# Altium PCB YA-N-PCB.PcbDoc
Units mm, origin at the board's own origin, x right, y up, seen from the top; angles counter-clockwise.
Board outline 60.1 x 78.1 mm, 2 copper layers (Top Layer, Bottom Layer); 104 components, 57 nets, 297 pads, 299 vias.
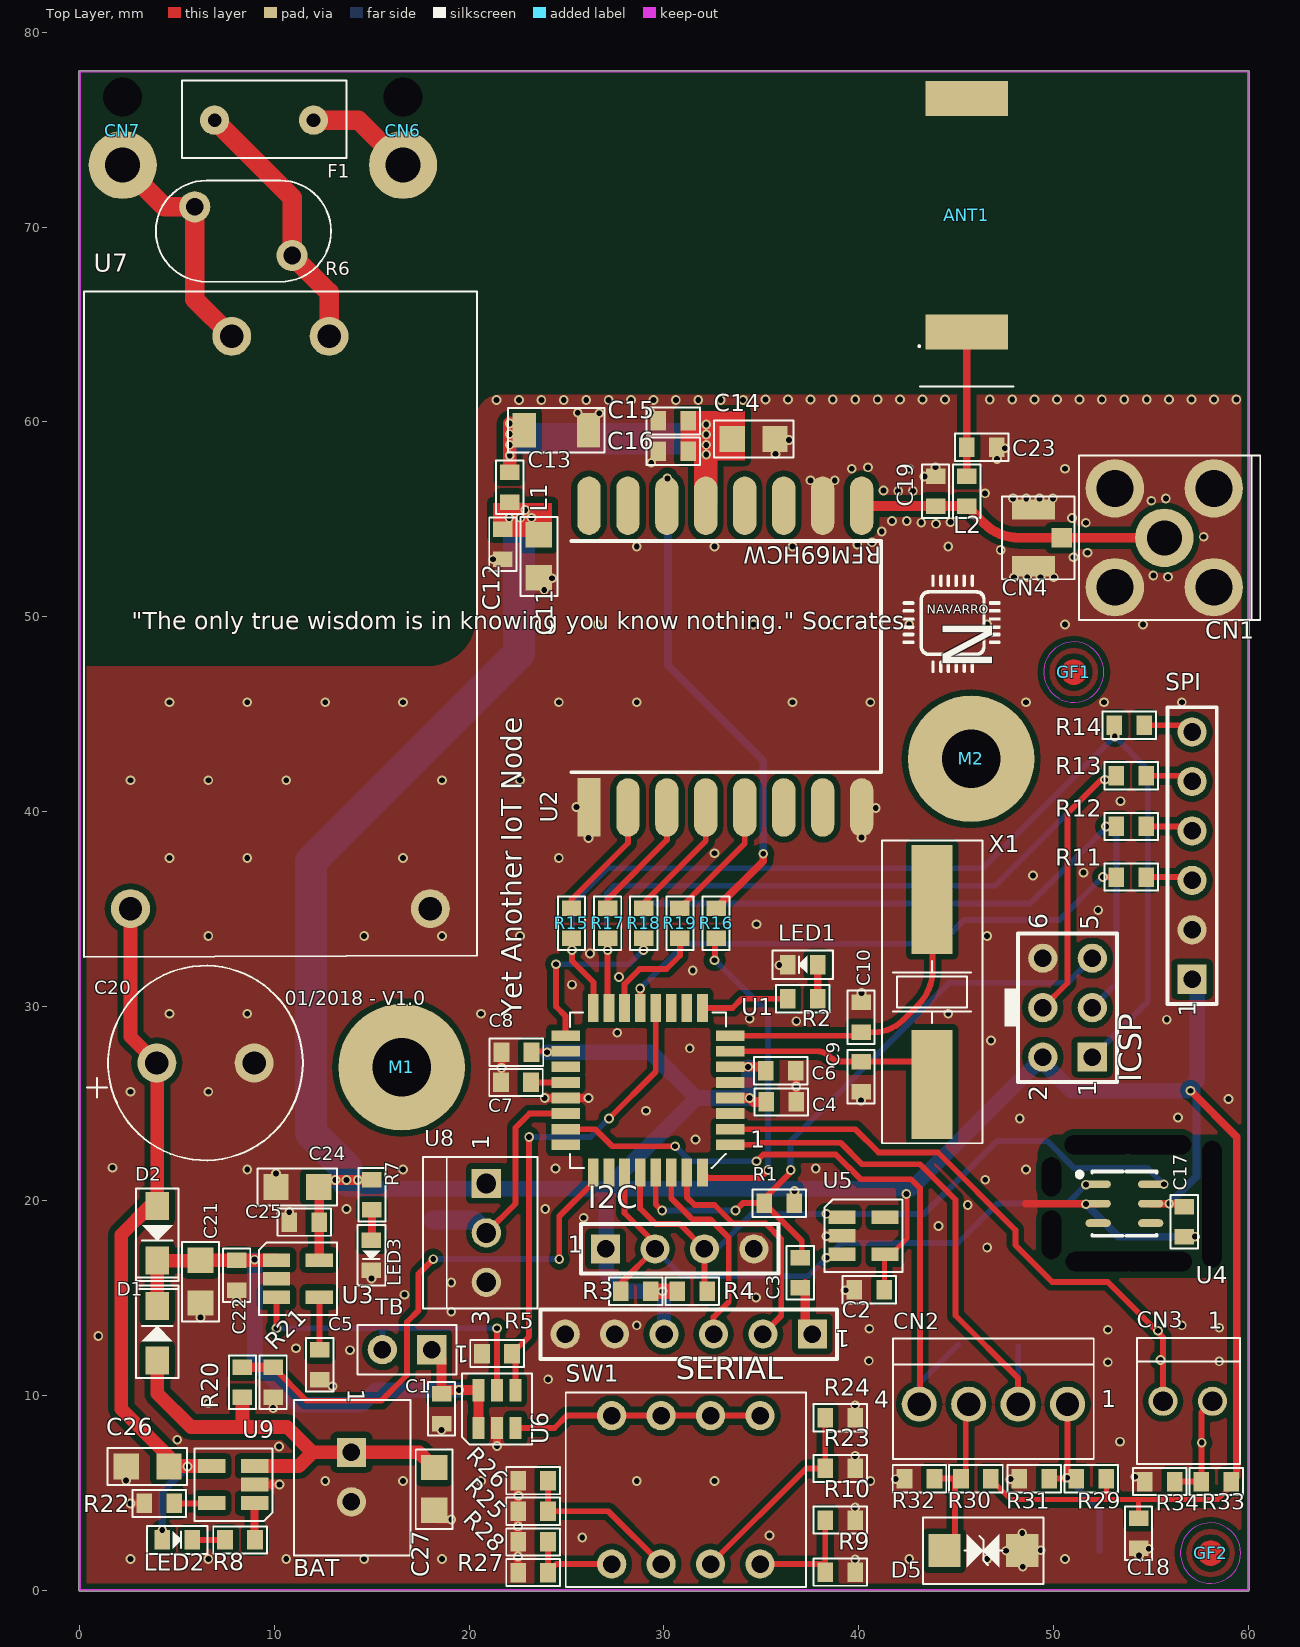
[diagram p0: Top Layer view]
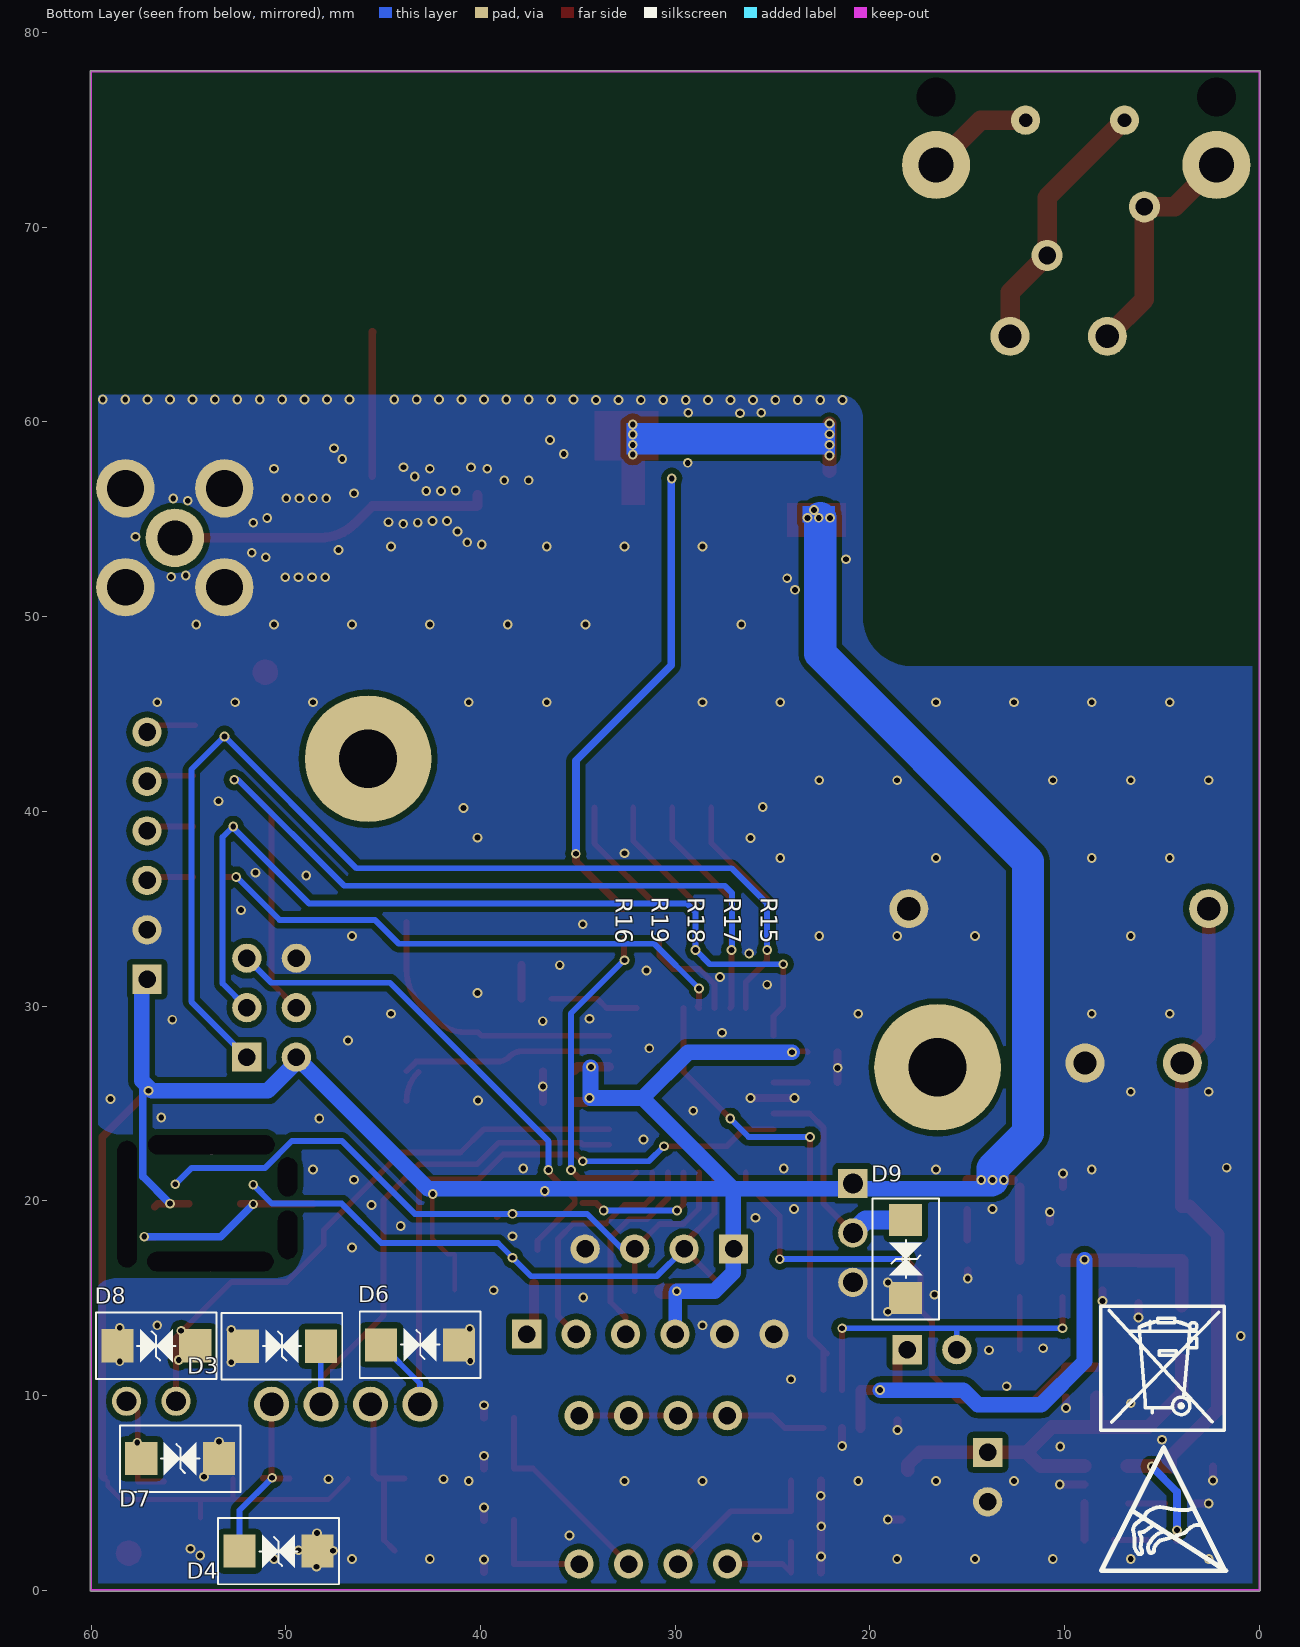
[diagram p1: Bottom Layer view, seen from below]

## Layer stack, top to bottom
Top Solder: solder mask 0.0102, Solder Resist, Dk 3.5
Top Layer: signal copper 0.0356
Dielectric 1: dielectric 0.32, FR-4, Dk 4.8
Bottom Layer: signal copper 0.0356
Bottom Solder: solder mask 0.0102, Solder Resist, Dk 3.5

## Board outline
0,-0.05 cw(c0,0) -0.05,0 -0.05,78 cw(c0,78) 0,78.05 60,78.05 cw(c60,78) 60.05,78 60.05,0 cw(c60,0) 60,-0.05

## Design rules (kind name [scope] priority, off if disabled: settings)
Clearance [All] p1: gap=0.3 ignorepadtopadclearanceinfootprint=FALSE except(0: Arc-Hole Track-Hole SMDPad-Hole THPad-Hole Via-Hole Fill-Hole Poly-Hole Region-Hole Text-Hole)
PolygonConnect [All] p1: connectstyle=Direct reliefconductorwidth=0.254 reliefentries=4 polygonreliefangle="90 Angle" airgapwidth=0.254
RoutingVias [All] p1: holewidth=0.711 width=1.27 viastyle="Through Hole" minholewidth=0.711 minwidth=1.27 maxholewidth=0.711 maxwidth=1.27
SolderMaskExpansion [All] p1: expansion=0.102
Width [All] p1: maxlimit=10 minlimit=0.254 preferedwidth=0.254 minimp=50.000000 maximp=50.000000 favimp=50.000000
30 further rules are at their usual default settings.

## Classes and differential pairs
component class "Power Supply": BAT C1 C5 C20 C21 C22 C24 C25 C26 C27 CN6 CN7 D1 D2 F1 LED2 LED3 R5 R6 R7 R8 R9 R10 R22 R23 R24 R25 R26 R27 R28 SW1 TB U3 U6 U7 U9
component class Radio: ANT1 C11 C12 C13 C14 C15 C16 C19 C23 CN1 CN4 L1 L2 R15 R16 R17 R18 R19 U2
component class Microcontroller: C2 C3 C4 C6 C7 C8 C9 C10 C18 CN2 CN3 D3 D4 D5 D6 D7 D8 D9 ICSP LED1 R1 R2 R11 R12 R13 R14 R20 R21 R29 R30 R31 R32 R33 R34 SERIAL SPI U1 U5 U8 X1
component class Sensors: C17 I2C R3 R4 U4
component class YA-N-Block: GF1 GF2 M1 M2

## Components (designator, comment, footprint, x,y, rotation, side; value= is the part's Value field where it differs from the comment)
ANT1 "Antena" ANT1204LL05R0915A 45.55,64.625 r90 top value="Antena Yageo"
BAT "Header 2" "CONN XH2.54 - 2" 13.95,7.075 r270 top value="Barra de 40 pinos - ATENÇÃO"
C1 "Capacitor Cerâmico" CC0603 18.575,9.325 r90 top value=100nF
C2 "Capacitor Cerâmico" CC0603 40.55,15.425 r0 top value=100nF
C3 "Capacitor Cerâmico" CC0603 37,16.3 r90 top value=100nF
C4 "Capacitor Cerâmico" CC0603 36.025,25.075 r180 top value=100nF
C5 "Capacitor Cerâmico" CC0603 12.325,11.575 r90 top value=10nF
C6 "Capacitor Cerâmico" CC0603 36,26.675 r180 top value=100nF
C7 "Capacitor Cerâmico" CC0603 22.4,26.075 r0 top value=100nF
C8 "Capacitor Cerâmico" CC0603 22.425,27.625 r0 top value=1uF
C9 "Capacitor Cerâmico" CC0603 40.125,26.375 r90 top value=20pF
C10 "Capacitor Cerâmico" CC0603 40.125,29.425 r270 top value=20pF
C11 "Capacitor Cerâmico" CC0805 23.575,53.1 r90 top value=10uF
C12 "Capacitor Cerâmico" CC0603 21.725,53.725 r90 top value=100nF
C13 "Capacitor Cerâmico" CC1206 24.475,59.575 r180 top value=100uF
C14 "Capacitor Cerâmico" CC0805 34.6,59.125 r180 top value=10uF
C15 "Capacitor Cerâmico" CC0603 30.475,60.05 r0 top value=1uF
C16 "Capacitor Cerâmico" CC0603 30.475,58.5 r0 top value=100nF
C17 "Capacitor Cerâmico" CC0603 56.725,18.925 r90 top value=100nF
C18 "Capacitor Cerâmico" CC0603 54.375,2.925 r90 top value=100nF
C19 "Capacitor Cerâmico" CC0603 43.95,56.45 r270 top value=OPEN
C20 "Capacitor Aluminio" CPOLRAD10X20 6.45,27.075 r180 top value=220uF
C21 "Capacitor Cerâmico" CC0805 6.2,15.85 r90 top value=10uF
C22 "Capacitor Cerâmico" CC0603 8.05,16.175 r90 top value=100nF
C23 "Capacitor Cerâmico" CC0603 46.325,58.7 r180 top value=OPEN
C24 "Capacitor Cerâmico" CC0805 11.175,20.7 r0 top value=10uF
C25 "Capacitor Cerâmico" CC0603 11.525,18.9 r0 top value=100nF
C26 "Capacitor Cerâmico" CC0805 3.475,6.35 r0 top value=4.7uF
C27 "Capacitor Cerâmico" CC0805 18.2,5.2 r90 top value=4.7uF
CN1 "Conn SMA" "CONN SMA-JACK" 55.7,54.05 r270 top value=SMA
CN2 "Conector KK" "CONN HDR4-POL P.100" 45.65,9.55 r0 top value="Macho - 4 Polos"
CN3 "Conector KK" "CONN HDR2-POL P.100" 58.175,9.7 r0 top value="Macho - 2 Polos"
CN4 "UMCC" "CONN U.FL" 48.975,54.05 r90 top
CN6 "CONN THRU" "CONN THRU" 16.6,73.2 r90 top
CN7 "CONN THRU" "CONN THRU" 2.2,73.2 r90 top
D1 "MBR0520L" SOD-123F 3.975,13.2 r90 top value=Vf=385mV@500mA
D2 "MBR0520L" SOD-123F 3.975,18.325 r270 top value=Vf=385mV@500mA
D3 "SMAJ5.0CA" "SMA BIDIR" 50.2,12.525 r0 bottom value=TVS
D4 "SMAJ5.0CA" "SMA BIDIR" 50.375,2 r180 bottom value=TVS
D5 "SMAJ5.0CA" "SMA BIDIR" 46.4,2.025 r180 top value=TVS
D6 "SMAJ5.0CA" "SMA BIDIR" 43.1,12.6 r0 bottom value=TVS
D7 "SMAJ5.0CA" "SMA BIDIR" 55.425,6.75 r0 bottom value=TVS
D8 "SMAJ5.0CA" "SMA BIDIR" 56.65,12.55 r180 bottom value=TVS
D9 "SMAJ5.0CA" "SMA BIDIR" 18.16,17.01 r90 bottom value=TVS
F1 "Fuse" BLOCKFUS_4X8 12,75.5 r180 top
GF1 "Fiducial" FIDUCIAL 51.05,47.15 r0 top
GF2 "Fiducial" FIDUCIAL 58.075,1.9 r0 top
I2C "Header 4" "CONN HDR1X4" 27,17.525 r0 top value="Macho - 4 Polos"
ICSP "Header 3X2" "CONN HDR2X3" 52,27.375 r90 top value=Macho
L1 "Bead" CC0603 22.075,56.65 r90 top value=1K@100MHz
L2 "Bead" CC0603 45.555,56.45 r90 top value=0uH
LED1 "LED" "LED 0603" 37.125,32.125 r180 top value=VD
LED2 "LED" "LED 0603" 5,2.575 r0 top value=VD
LED3 "LED" "LED 0603" 14.975,17.2 r270 top value=VD
M1 "Furo de Fixação" Furo_M3 16.525,26.85 r0 top value=M3
M2 "Furo de Fixação" Furo_M3 45.775,42.7 r0 top value=M3
R1 "Resistor" CC0603 35.925,19.875 r0 top value=10K
R2 "Resistor" CC0603 37.125,30.375 r180 top value=1K
R3 "Resistor" CC0603 28.55,15.35 r0 top value=4K7
R4 "Resistor" CC0603 31.45,15.35 r180 top value=4K7
R5 "Resistor" CC0603 21.425,12.15 r0 top value=10K
R6 "Varistor" DISCFUS7 8.4,69.8 r0 top value=270V
R7 "Resistor" CC0603 15,20.3 r90 top value=1K
R8 "Resistor" CC0603 8.225,2.575 r180 top value=470R
R9 "Resistor" CC0603 39.05,0.925 r180 top value=*R
R10 "Resistor" CC0603 39.05,3.6 r180 top value=*R
R11 "Resistor" CC0603 54,36.625 r0 top value=560R
R12 "Resistor" CC0603 54,39.225 r0 top value=560R
R13 "Resistor" CC0603 54,41.825 r0 top value=560R
R14 "Resistor" CC0603 53.9,44.425 r0 top value=560R
R15 "Resistor" CC0603 25.25,34.25 r90 top value=560R
R16 "Resistor" CC0603 32.675,34.25 r270 top value=560R
R17 "Resistor" CC0603 27.106,34.25 r90 top value=560R
R18 "Resistor" CC0603 28.962,34.25 r90 top value=560R
R19 "Resistor" CC0603 30.819,34.25 r90 top value=560R
R20 "Resistor" CC0603 8.35,10.675 r270 top value=*R
R21 "Resistor" CC0603 9.925,10.675 r90 top value=*R
R22 "Resistor" CC0603 4.075,4.45 r0 top value=*R
R23 "Resistor" CC0603 39.05,6.25 r180 top value=*R
R24 "Resistor" CC0603 39.05,8.85 r180 top value=*R
R25 "Resistor" CC0603 23.275,4.05 r0 top value=*R
R26 "Resistor" CC0603 23.275,5.625 r0 top value=*R
R27 "Resistor" CC0603 23.275,0.9 r0 top value=*R
R28 "Resistor" CC0603 23.275,2.475 r0 top value=*R
R29 "Resistor Open" CC0603 51.95,5.725 r0 top value=OPEN
R30 "Resistor Open" CC0603 46.025,5.725 r0 top value=OPEN
R31 "Resistor Open" CC0603 49.025,5.725 r0 top value=OPEN
R32 "Resistor Open" CC0603 43.125,5.725 r0 top value=OPEN
R33 "Resistor Open" CC0603 58.375,5.575 r0 top value=OPEN
R34 "Resistor Open" CC0603 55.475,5.575 r0 top value=OPEN
SERIAL "Header 6" "CONN HDR1X6" 37.625,13.15 r180 top value="Barra de 40 pinos - ATENÇÃO"
SPI "Header 6" "CONN HDR1X6" 57.125,31.375 r90 top value="Barra de 40 pinos - ATENÇÃO"
SW1 "SW-DIP4" SWITCH-DIP8 31.125,5.15 r0 top value=SPST
TB "Timer Bypass" "CONN HDR1X2" 18.075,12.35 r180 top value="Barra de 40 pinos - ATENÇÃO"
U1 "ATMEGA328P" TQFP-32N 29.175,25.675 r180 top
U2 "RFM69HCW" RFM69HCW 26.15,40.2 r90 top value="Rádio 915Mhz"
U3 "TPS79333DBVR" SOT-23-5N 11.2,16 r0 top
U4 "SI7006" QFN3x3-6P 53.65,19.85 r0 top
U5 "24AA02UIDT" SOT-23-5N 40.25,18.2 r0 top
U6 "TPL5111" TSOT-23-6N 21.425,9.3 r90 top
U7 "Hi-Link" Fonte-HILINK 10.3,49.7 r90 top
U8 "LM35" "CONN HDR3-POL P.100" 20.875,18.35 r90 top value=1MHz
U9 "MCP73831" SOT-23-5N 7.875,5.425 r180 top value="Vchrg=4V2 ~ 4V5"
X1 "16Mhz" HC/49US 43.775,30.725 r90 top value=20pF/40R

## Footprints (in the part's own frame and the unit in brackets; to place one, negate y for a bottom-side part, rotate by r counter-clockwise, add the part's x,y. Pads: shape width x height; smd on the part's side, far side on the other; paste and mask are expansions set on the pad)
ANT1204LL05R0915A [mm]
  rect 1.8x4.25 smd: 1(0,0) 2(12,0)
  silkscreen extent -2.8,-2.4 -0.68,2.49, body extent -0.1,-2.1 12.1,2.1, height 1.95
BLOCKFUS_4X8 [mm]
  round 1.499 hole 0.7: 1(0,0) 2(5.08,0)
  silkscreen extent -1.7,-2.05 6.74,1.95, body extent -1.7,-2.05 6.74,1.95, height 8.35
CC0603 [mm] "Chip Resistor, 2-Leads, Body 1,6x0,8mm, IPC Medium Density"
  rect 0.8x1 smd: 1(-0.77,0) 2(0.77,0)
  silkscreen extent -1.38,-0.7 1.38,0.7, body extent -0.8,-0.42 0.8,0.43, height 0.45
CC0805 [mm] "Chip Resistor, 2-Leads, Body 2,0x1,2mm, IPC Medium Density"
  rect 1.3x1.35 smd: 1(-1.1,0) 2(1.1,0)
  silkscreen extent -2.05,-0.95 2.02,0.95, body extent -1,-0.62 1,0.63, height 0.6
CC1206 [mm] "Chip Resistor, 2-Leads, Body 3,2x1,6mm, IPC Medium Density"
  rect 1.2x1.75 smd: 1(-1.65,0) 2(1.65,0)
  silkscreen extent -2.47,-1.15 2.47,1.15, body extent -1.6,-0.8 1.6,0.8, height 1
"CONN HDR1X2" [mm] "Connector; Header; 2 Position"
  rect 1.5x1.5 hole 0.9: 1(0,0)
  round 1.5 hole 0.9: 2(2.54,0)
  silkscreen extent -1.27,-1.27 3.81,1.27, body extent -1.27,-1.27 3.81,1.27, height 8.49
"CONN HDR1X4" [mm] "Connector; Header; 4 Position"
  rect 1.5x1.5 hole 0.9: 1(0,0)
  round 1.5 hole 0.9: 2(2.54,0) 3(5.08,0) 4(7.62,0)
  silkscreen extent -1.27,-1.27 8.89,1.27
"CONN HDR1X6" [mm] "Connector; Header; 6 Position"
  rect 1.5x1.5 hole 0.9: 1(0,0)
  round 1.5 hole 0.9: 2(2.54,0) 3(5.08,0) 4(7.62,0) 5(10.16,0) 6(12.7,0)
  silkscreen extent -1.27,-1.27 13.97,1.27
"CONN HDR2-POL P.100" [mm] "Conector KK Macho, Pitch 2.54mm, 2 Polos"
  round 1.5 hole 1.02: 1(0,0) 2(-2.54,0)
  silkscreen extent -3.89,-3.23 1.4,3.25, body extent -3.82,-3.12 1.26,3.23, height 10.69
"CONN HDR2X3" [mm] "Connector; Header; 3x2 Position"
  rect 1.5x1.5 hole 0.9: 1(0,0)
  round 1.5 hole 0.9: 2(0,2.54) 3(2.54,0) 4(2.54,2.54) 5(5.08,0) 6(5.08,2.54)
  silkscreen extent -1.27,-1.27 6.35,3.81, body extent -1.27,-1.27 6.35,3.81, height 8.49
"CONN HDR3-POL P.100" [mm] "Conector KK Macho, Pitch 2.54mm, 3 Polos"
  rect 1.5x1.5 hole 1.02: 1(2.54,0)
  round 1.5 hole 1.02: 2(0,0) 3(-2.54,0)
  silkscreen extent -3.89,-2.62 3.89,3.25, body extent -3.71,-2.36 3.79,2.54, height 10.4
"CONN HDR4-POL P.100" [mm] "Conector KK Macho, Pitch 2.54mm, 4 Polos"
  round 1.8 hole 1.2: 1(5.08,0) 2(2.54,0) 3(0,0) 4(-2.54,0)
  silkscreen extent -3.89,-2.81 6.43,3.38, body extent -3.49,-2.71 6.01,3.29, height 12
"CONN SMA-JACK" [mm]
  round 3 hole 1.8: 1(0,0)
  round 3 hole 1.9: 2(2.54,-2.54) 3(2.54,2.54) 4(-2.54,2.54) 5(-2.54,-2.54)
  silkscreen extent -4.22,-4.37 4.22,4.93
"CONN THRU" [mm]
  round 0 hole 2 unplated: 0(3.5,0)
  round 3.5 hole 1.8: 1(0,0)
"CONN U.FL" [mm] "LCC, 4-Pins, Body 3,4x5,2mm (max), Pitch 2,70mm, IPC High Density"
  rect 1x1.05 smd: 1(0,-1.452)
  rect 1.05x2.2 smd: 2(-1.452,0) 2(1.452,0)
  silkscreen extent -2.13,-2.12 2.12,1.61, body extent -1.5,-1.55 1.5,1.55, height 1.26
"CONN XH2.54 - 2" [mm] "Connector; Header; 2 Position"
  rect 1.5x1.5 hole 0.9: 1(0,0)
  round 1.5 hole 0.9: 2(2.54,0)
  silkscreen extent -2.69,-2.95 5.31,3.04, body extent -2.69,-2.95 5.31,3.05, height 7
CPOLRAD10X20 [mm]
  round 2 hole 1.2: 1(2.5,0) 2(-2.5,0)
  silkscreen extent -5,-5 6.08,5, body extent -5.08,-5.08 5.08,5.06, height 20.32
DISCFUS7 [mm]
  round 1.6 hole 0.9 mask+0.127: 1(-2.5,1.25) 2(2.5,-1.25)
  silkscreen extent -4.5,-2.6 4.5,2.6
FIDUCIAL [mm] "Guia fiducial sem uso de PAD"
  Top Layer region: 0,-0.65 -0.249,-0.601 -0.46,-0.46 -0.601,-0.249 -0.65,0 -0.65,0 -0.601,0.249 -0.46,0.46 -0.249,0.601 0,0.65 0,0.65 0.249,0.601 0.46,0.46 0.601,0.249 0.65,0 0.65,0 0.601,-0.249 0.46,-0.46 0.249,-0.601 0,-0.65
  Top Layer keep-out circle w0.01: c0,0 r1.55
Fonte-HILINK [mm]
  round 2 hole 1.2: 1(-14.7,7.7) 2(-14.7,-7.7) 3(14.7,-2.5) 4(14.7,2.5)
  silkscreen extent -17.19,-10.1 17,10.1, body extent -17.19,-10.1 17,10.1, height 15
Furo_M3 [mm] "Furo metalizado para parafuso M3"
  round 6.5 hole 3 paste+0: X(0,0)
  body extent -2.8,-2.8 2.8,2.8, height 2.38
HC/49US [mm] "Crystal, 2-Leads, Body 11,5x4,7mm, IPC Low Density"
  rect 5.6x2.1 smd: 1(-4.75,0) 2(4.75,0)
  silkscreen extent -7.77,-2.58 7.78,2.58, body extent -6.15,-2.25 6.15,2.25, height 5.18
"LED 0603" [mm] "Chip Diode, 2-Leads, Body 1,6x0,8mm, IPC Medium Density"
  rect 0.8x1 smd: 1(-0.77,0) 2(0.77,0)
  silkscreen extent -1.55,-0.72 1.55,0.72, body extent -0.82,-0.43 0.82,0.43, height 0.8
QFN3x3-6P [mm]
  oval 1.3x0.4 smd: 1(-1.35,1) 2(-1.35,0) 3(-1.35,-1) 4(1.35,-1) 5(1.35,0) 6(1.35,1)
  silkscreen extent -2.42,-1.65 1.65,1.65, body extent -1.5,-1.5 1.5,1.5, height 1.21
RFM69HCW [mm]
  rect 3x1.2 smd: 1(0,0)
  oval 3x1.2 smd: 2(0,-2) 3(0,-4) 4(0,-6) 5(0,-8) 6(0,-10) 7(0,-12) 8(0,-14) 9(15.5,-14) 10(15.5,-12) 11(15.5,-10) 12(15.5,-8) 13(15.5,-6) 14(15.5,-4) 15(15.5,-2) 16(15.5,0)
  silkscreen extent 1.81,-15 13.69,0.9, body extent -0.27,-14.97 15.73,0.93, height 2.29
"SMA BIDIR" [mm] "Molded Diode, 2-Leads, Body 4,3x2,5mm, IPC Medium Density"
  rect 1.65x1.7 smd: 1(-2,0) 2(2,0)
  silkscreen extent -3.1,-1.7 3.1,1.7, body extent -2.29,-1.39 2.28,1.4, height 2.31
SOD-123F [mm] "Molded Diode, 2-Leads, Body 2,6x1,7mm, IPC Medium Density"
  rect 1.45x1.2 smd: 1(-1.4,0) 2(1.4,0)
  silkscreen extent -2.3,-1.1 2.45,1.1, body extent -1.4,-0.95 1.4,0.95, height 1.11
SOT-23-5N [mm] "SOT23, 5-Leads, Body 3,1x2,7mm (max), Pitch 0,95mm, IPC Medium Density"
  rect 1.4x0.7 smd: 1(-1.1,0.95) 2(-1.1,0) 3(-1.1,-0.95) 4(1.1,-0.95) 5(1.1,0.95)
  silkscreen extent -2.01,-1.86 2,1.86, body extent -1.4,-1.45 1.4,1.45, height 1.09
SWITCH-DIP8 [mm] "DIP; 4 Leads; Row Spacing 7.62 mm; Pitch 2.54 mm"
  round 1.5 hole 0.9: 1(3.81,3.81) 2(1.27,3.81) 3(-1.27,3.81) 4(-3.81,3.81) 5(-3.81,-3.81) 6(-1.27,-3.81) 7(1.27,-3.81) 8(3.81,-3.81)
  silkscreen extent -6.17,-5 6.17,5, body extent -6.17,-4.89 6.17,4.89, height 8.14
TQFP-32N [mm] "TQFP, 32-Leads, Body 7.00x7.00mm, Pitch 0.80mm, IPC Medium Density"
  rect 1.45x0.55 smd: 1(-4.225,2.8) 2(-4.225,2) 3(-4.225,1.2) 4(-4.225,0.4) 5(-4.225,-0.4) 6(-4.225,-1.2) 7(-4.225,-2) 8(-4.225,-2.8) 17(4.225,-2.8) 18(4.225,-2) 19(4.225,-1.2) 20(4.225,-0.4) 21(4.225,0.4) 22(4.225,1.2) 23(4.225,2) 24(4.225,2.8)
  rect 0.55x1.45 smd: 9(-2.8,-4.225) 10(-2,-4.225) 11(-1.2,-4.225) 12(-0.4,-4.225) 13(0.4,-4.225) 14(1.2,-4.225) 15(2,-4.225) 16(2.8,-4.225) 25(2.8,4.225) 26(2,4.225) 27(1.2,4.225) 28(0.4,4.225) 29(-0.4,4.225) 30(-1.2,4.225) 31(-2,4.225) 32(-2.8,4.225)
  silkscreen extent -4,-4 4,4, body extent -4.5,-4.5 4.5,4.5, height 1.5
TSOT-23-6N [mm] "Thin SOT23, 6-Leads, Body 3,1x2,7mm (max), Pitch 0,95mm, IPC Medium Density"
  rect 1.15x0.6 smd: 1(-0.975,0.95) 2(-0.975,0) 3(-0.975,-0.95) 4(0.975,-0.95) 5(0.975,0) 6(0.975,0.95)
  silkscreen extent -1.83,-1.8 1.83,1.8, body extent -0.87,-1.55 0.87,1.55, height 1

## Part data
ANT1: library part "Antena Yageo 915Mhz", "Antena YAGEO", Supplier Part Number 1=311-1525-1-ND, ChinesePrice=0,00000, Chinês=----, ComponentLink1Description=Datasheet, ComponentLink1URL=D:\Tecnoclade\Datasheet\, Supplier 1=Digi-Key
BAT: "Header, 2-Pin", Supplier Part Number 1=A26509-40-ND, ChinesePrice=0,10000, Chinês="Proved - Local", ComponentLink1Description=Datasheet, ComponentLink1URL=D:\Tecnoclade\Datasheet\!DataMissing.pdf, Supplier 1=Digi-Key
C1 C2 C3 C4 C6 C7 C12 C16 C18 C22 C25: library part "Cap 100nF 50V 0603 X7R", "Capacitor (Semiconductor SIM Model)", Supplier Part Number 1=1276-1000-1-ND, Tolerância=±10%, ChinesePrice=0,00250, Chinês=Local, ComponentLink1Description=Datasheet, ComponentLink1URL=D:\Tecnoclade\Datasheet\!DataMissing.pdf, Corrente=*A, Obs=X7R, Potência=*W, Supplier 1=Digi-Key, Tensão=50V
C5: library part "Cap 10nF 50V 0603 X7R 5%", "Capacitor (Semiconductor SIM Model)", Supplier Part Number 1=399-1092-1-ND, Tolerância=±5%, ChinesePrice=0,00320, Chinês=Local, ComponentLink1Description=Datasheet, ComponentLink1URL=D:\Tecnoclade\Datasheet\!DataMissing.pdf, Corrente=*A, Obs=X7R, Potência=*W, Supplier 1=Digi-Key, Tensão=50V
C8 C15: library part "Cap 1uF 50V 0603 X5R", "Capacitor (Semiconductor SIM Model)", Supplier Part Number 1=587-2400-1-ND, Tolerância=±10%, ChinesePrice=0,01100, Chinês=Local, ComponentLink1Description=Datasheet, ComponentLink1URL=D:\Tecnoclade\Datasheet\!DataMissing.pdf, Corrente=*A, Obs=X5R, Potência=*W, Supplier 1=Digi-Key, Tensão=50V
C9 C10: library part "Cap - $Val $V $Footprint $Classe_1", "Capacitor (Semiconductor SIM Model)", Supplier Part Number 1=1276-1187-1-ND, Tolerância=±*%, ChinesePrice=0,00000, Chinês=----, ComponentLink1Description=Datasheet, ComponentLink1URL=D:\Tecnoclade\Datasheet\!DataMissing.pdf, Corrente=*A, Potência=*W, Supplier 1=Digi-Key, Tensão=50v
C11 C14 C21 C24: library part "Cap 10uF 25V 0805 X5R", "Capacitor (Semiconductor SIM Model)", Supplier Part Number 1=587-2985-1-ND, Tolerância=±10%, ChinesePrice=0,02620, Chinês=Local, ComponentLink1Description=Datasheet, ComponentLink1URL=D:\Tecnoclade\Datasheet\!DataMissing.pdf, Corrente=*A, Obs=X5R, Potência=*W, Supplier 1=Digi-Key, Tensão=25V
C13: library part "Cap 100uF 6.3V 1206 X5R", "Capacitor (Semiconductor SIM Model)", Supplier Part Number 1=490-7217-1-ND, Tolerância=±20%, ChinesePrice=0,00000, Chinês=-----, ComponentLink1Description=Datasheet, ComponentLink1URL=D:\Tecnoclade\Datasheet\!DataMissing.pdf, Corrente=*A, Obs=X5R, Potência=*W, Supplier 1=Digi-Key, Tensão=6.3V
C17: library part "Cap 100nF 25V 0603 X7R", "Capacitor (Semiconductor SIM Model)", Supplier Part Number 1=490-1524-1-ND, Tolerância=±10%, ChinesePrice=0,00246, Chinês=Local, ComponentLink1Description=Datasheet, ComponentLink1URL=D:\Tecnoclade\Datasheet\!DataMissing.pdf, Corrente=*A, Obs=X7R, Potência=*W, Supplier 1=Digi-Key, Tensão=25V
C19 C23: library part "Cap OPEN 0603", "Capacitor (Semiconductor SIM Model)", Supplier Part Number 1=--Del, Tolerância=±*%, ChinesePrice=0,00000, Chinês=-----, ComponentLink1Description=Datasheet, ComponentLink1URL=D:\Tecnoclade\Datasheet\!DataMissing.pdf, Corrente=*A, Potência=*W, Supplier 1=Digi-Key, Tensão=*V
C20: library part "PCap 220uF 50V CPOLRAD10X20 LOESR", "Polarized Capacitor", Supplier Part Number 1=565-3452-ND, Tolerância=±20%, ChinesePrice=0,00000, Chinês=-----, ComponentLink1Description=Datasheet, ComponentLink1URL="D:\Tecnoclade\Datasheet\Capacitor e_PZA.pdf", Corrente="970mA (Ripple)", Obs="LOESR (0R19)", Potência=*W, Supplier 1=Digi-Key, Tensão=50V
C26 C27: library part "Cap 4.7uF 16V 0805 X5R", "Capacitor (Semiconductor SIM Model)", Supplier Part Number 1=1276-1065-1-ND, Tolerância=±10%, ChinesePrice=0,01480, Chinês=Local, ComponentLink1Description=Datasheet, ComponentLink1URL=D:\Tecnoclade\Datasheet\!DataMissing.pdf, Corrente=*A, Obs=X5R, Potência=*W, Supplier 1=Digi-Key, Tensão=16V
CN1: "Conector SMA", Supplier Part Number 1=A97593-ND, ChinesePrice=0,00000, Chinês=----, ComponentLink1Description=Datasheet, ComponentLink1URL=D:\Tecnoclade\Datasheet\!DataMissing.pdf, Supplier 1=Digi-Key
CN2: library part "KK 4P Macho-V P2.54mm", Supplier Part Number 1=A19431-ND, ChinesePrice=0,00000, Chinês=----, ComponentLink1Description=Datasheet, ComponentLink1URL=D:\Tecnoclade\Datasheet\!DataMissing.pdf, Supplier 1=Digi-Key
CN3: library part "KK 2P Macho-V P2.54mm", Supplier Part Number 1=A19423-ND, ChinesePrice=0,01400, Chinês=Local, ComponentLink1Description=Datasheet, ComponentLink1URL=D:\Tecnoclade\Datasheet\!DataMissing.pdf, Supplier 1=Digi-Key
CN4: library part "Conn UMCC TE", Supplier Part Number 1=A118077CT-ND, ChinesePrice=0,00000, Chinês=----, ComponentLink1Description=Datasheet, ComponentLink1URL=D:\Tecnoclade\Datasheet\!DataMissing.pdf, Supplier 1=Digi-Key
CN6 CN7: Supplier Part Number 1=--Not, Chinês="Proved - Local", ComponentLink1Description=Datasheet, ComponentLink1URL=D:\Tecnoclade\Datasheet\!DataMissing.pdf, Supplier 1=Digi-Key
D1 D2: library part "DS 20V 0.5A 385mV SOD-123", "Schottky Diode", Supplier Part Number 1=MBR0520L-TPMSCT-ND, ChinesePrice=0,00000, Chinês=----, ComponentLink1Description=Datasheet, ComponentLink1URL=D:\Tecnoclade\Datasheet\!DataMissing.pdf, Corrente=0.5A, Obs="Fast Recovery =< 500ns, > 200mA (Io)", Supplier 1=Digi-Key, Tensão=20V
D3 D4 D5 D6 D7 D8 D9: library part "TVS 5V 5% SMA BI 400W", "Transient Voltage Supressor diode", Supplier Part Number 1=SMAJ5.0CABCT-ND, Tolerância=±5%, ChinesePrice=0,00000, Chinês=----, ComponentLink1Description=Datasheet, ComponentLink1URL=D:\Tecnoclade\Datasheet\!DataMissing.pdf, Obs=Bidirecional, Potência=400W, Supplier 1=Digi-Key, Tensão=5V
F1: library part "Fuse Disc", Supplier Part Number 1=507-1173-ND, ChinesePrice=0,00000, Chinês=----, ComponentLink1Description=Datasheet, ComponentLink1URL=D:\Tecnoclade\Datasheet\, Corrente=500mA, Supplier 1=Digi-Key, Tensão=250v
GF1 GF2: "Guia Fiducial", Supplier Part Number 1=--Del, ChinesePrice=0,00000, Chinês=----, ComponentLink1Description=Datasheet, ComponentLink1URL=D:\Tecnoclade\Datasheet\, Supplier 1=Digi-Key
I2C: "Header, 4-Pin", Supplier Part Number 1=A26509-40-ND, ChinesePrice=0,10000, Chinês="Proved - Local", ComponentLink1Description=Datasheet, ComponentLink1URL=D:\Tecnoclade\Datasheet\!DataMissing.pdf, Obs="Barra de 40 pinos - ATENÇÃO", Supplier 1=Digi-Key
ICSP: "Header, 5-Pin, Dual row", Supplier Part Number 1=609-3724-ND, ChinesePrice=0,00000, Chinês=----, ComponentLink1Description=Datasheet, ComponentLink1URL=D:\Tecnoclade\Datasheet\!DataMissing.pdf, Obs="Barra dupla de 40 pinos - ATENÇÃO", Supplier 1=Digi-Key
L1: library part "Bd 1K@100MHz 0603 400mA", Supplier Part Number 1=445-1550-1-ND, Tolerância=±25%, ChinesePrice=0,00000, Chinês=-----, ComponentLink1Description=Datasheet, ComponentLink1URL=D:\Tecnoclade\Datasheet\!DataMissing.pdf, Corrente=400mA, Obs="Ferrite (0R5)", Substituição=27/06/2014, Supplier 1=Digi-Key
L2: library part "Bd 1K@100MHz 0603 400mA", Supplier Part Number 1=712-1432-1-ND, Tolerância=±25%, ChinesePrice=0,00000, Chinês=-----, ComponentLink1Description=Datasheet, ComponentLink1URL=D:\Tecnoclade\Datasheet\!DataMissing.pdf, Corrente=400mA, Obs="Ferrite (0R5)", Substituição=27/06/2014, Supplier 1=Digi-Key
LED1 LED2 LED3: library part "LED 0603 VD 2V 75mW", Supplier Part Number 1=160-1478-1-ND, ChinesePrice=0,02810, Chinês=Local, ComponentLink1Description=Datasheet, ComponentLink1URL=D:\Tecnoclade\Datasheet\!DataMissing.pdf, Corrente=20mA, Obs=35mcd@130º, Potência=75mW, Supplier 1=Digi-Key, Tensão=2V
M1 M2: library part Parafuso, "Furo para parafuso", Supplier Part Number 1=--Del, ChinesePrice=0,00000, Chinês=----, ComponentLink1Description=Datasheet, ComponentLink1URL=D:\Tecnoclade\Datasheet\!DataMissing.pdf, Supplier 1=Digi-Key
R1 R5: library part "Res 10K 1% 0603 1/10W", Supplier Part Number 1=P10.0KHCT-ND, Tolerância=±1%, ChinesePrice=0,00089, Chinês=Local, ComponentLink1Description=Datasheet, ComponentLink1URL=D:\Tecnoclade\Datasheet\!DataMissing.pdf, Corrente=*A, Potência=1/10W, Supplier 1=Digi-Key, Tensão=*V
R2 R7: library part "Res 1K 1% 0603 1/10W", Supplier Part Number 1=RMCF0603FT1K00CT-ND, Tolerância=±1%, ChinesePrice=0,00089, Chinês=Local, ComponentLink1Description=Datasheet, ComponentLink1URL=D:\Tecnoclade\Datasheet\!DataMissing.pdf, Corrente=*A, Potência=1/10W, Supplier 1=Digi-Key, Tensão=*V
R3 R4: library part "Res 4K7 1% 0603 1/10W", Supplier Part Number 1=RMCF0603FT4K70CT-ND, Tolerância=±1%, ChinesePrice=0,00000, Chinês=----, ComponentLink1Description=Datasheet, ComponentLink1URL=D:\Tecnoclade\Datasheet\!DataMissing.pdf, Corrente=*A, Obs=±100ppm/ºC, Potência=1/10W, Supplier 1=Digi-Key, Tensão=*V
R6: library part "Var 270V 1.2KA Disc7mm", "Varistor (Voltage-Sensitive Resistor)", Supplier Part Number 1=MOV-07D301KCT-ND, Tolerância=±*%, ChinesePrice=0,00000, Chinês=----, ComponentLink1Description=Datasheet, ComponentLink1URL=D:\Tecnoclade\Datasheet\!DataMissing.pdf, Corrente=1.2KA, Obs=MOV-07D301KTR, Potência=20J, Supplier 1=Digi-Key, Tensão="190Vac / 250Vdc"
R8: library part "Res 470R 5% 0603 1/10W", Supplier Part Number 1=RMCF0603JT470RCT-ND, Tolerância=±5%, ChinesePrice=0,00000, Chinês=----, ComponentLink1Description=Datasheet, ComponentLink1URL=D:\Tecnoclade\Datasheet\!DataMissing.pdf, Corrente=*A, Obs=±200ppm/ºC, Potência=1/10W, Supplier 1=Digi-Key, Tensão=*V
R9 R10 R20 R21 R22 R23 R24 R25 R26 R27 R28: library part "Res - $Val $% $Footprint $Pot", Supplier Part Number 1=--Del, Tolerância=±*%, ChinesePrice=0,00000, Chinês=----, ComponentLink1Description=Datasheet, ComponentLink1URL=D:\Tecnoclade\Datasheet\!DataMissing.pdf, Corrente=*A, Potência=1/10W, Supplier 1=Digi-Key, Tensão=*V
R11 R12 R13 R14 R15 R16 R17 R18 R19: library part "Res 560R 1% 0603 1/10w", Supplier Part Number 1=311-560HRCT-ND, Tolerância=±*%, ChinesePrice=0,00000, Chinês=----, ComponentLink1Description=Datasheet, ComponentLink1URL=D:\Tecnoclade\Datasheet\!DataMissing.pdf, Corrente=*A, Potência=1/10W, Supplier 1=Digi-Key, Tensão=*V
R29 R30 R31 R32 R33 R34: library part "Res Open 0603", "Resistor", Supplier Part Number 1=--Del, Tolerância=±*%, ChinesePrice=0,00000, Chinês=----, ComponentLink1Description=Datasheet, ComponentLink1URL=D:\Tecnoclade\Datasheet\!DataMissing.pdf, Corrente=*A, Potência=*W, Supplier 1=Digi-Key, Tensão=*V
SERIAL SPI: "Header, 6-Pin", Supplier Part Number 1=A26509-40-ND, ChinesePrice=0,10000, Chinês="Proved - Local", ComponentLink1Description=Datasheet, ComponentLink1URL=D:\Tecnoclade\Datasheet\!DataMissing.pdf, Supplier 1=Digi-Key
SW1: "4009 Series DIP Switch, Raised actuator", Supplier Part Number 1=--Del, ChinesePrice=0,00000, Chinês=----, ComponentLink1Description=Datasheet, ComponentLink1URL=D:\Tecnoclade\Datasheet\, Supplier 1=Digi-Key
TB: library part "Header 2", "Header, 2-Pin", Supplier Part Number 1=A26509-40-ND, ChinesePrice=0,10000, Chinês="Proved - Local", ComponentLink1Description=Datasheet, ComponentLink1URL=D:\Tecnoclade\Datasheet\!DataMissing.pdf, Supplier 1=Digi-Key
U1: "IC MCU 32KB FLASH 20MHZ 32TQFP", Supplier Part Number 1=ATMEGA328P-AN-ND, ChinesePrice=0,00000, Chinês=----, ComponentLink1Description=Datasheet, ComponentLink1URL=D:\Tecnoclade\Datasheet\, Supplier 1=Digi-Key
U2: "Memória", Supplier Part Number 1=--Del, ChinesePrice=4,34, Chinês=Local, ComponentLink1Description=Datasheet, ComponentLink1URL=D:\Tecnoclade\Datasheet\!DataMissing.pdf, Supplier 1=Digi-Key
U3: library part TPS79333, "ULTRALOW-NOISE, HIGH PSRR, FAST RF 200mA LOW-DROPOUT LINEAR  REGULATORS I", Supplier Part Number 1=296-12961-1-ND, ChinesePrice=0,00000, Chinês=----, ComponentLink1Description=Datasheet, ComponentLink1URL=D:\Tecnoclade\Datasheet\, Corrente=200mA, Supplier 1=Digi-Key, Tensão=3V3
U4: "SI7021-A20-GM1", Supplier Part Number 1=336-3141-ND, ChinesePrice=0,00000, Chinês=----, ComponentLink1Description=Datasheet, ComponentLink1URL=https://www.silabs.com/Support%20Documents%2FTechnicalDocs%2FSi7006-A20.pdf, Supplier 1=Digi-Key
U5: "IC EEPROM 2KBIT 400KHZ SOT23-5", Supplier Part Number 1=24AA02UIDT-I/OTCT-ND, ChinesePrice=0,00000, Chinês=----, ComponentLink1Description=Datasheet, ComponentLink1URL=D:\Tecnoclade\Datasheet\, Corrente=200mA, Supplier 1=Digi-Key, Tensão=3V3
U6: "Nano-Power System Timer for Power Gating", Supplier Part Number 1=296-42621-1-ND, Chinês=Local, ComponentLink1Description=Datasheet, ComponentLink1URL=D:\Tecnoclade\Datasheet\!DataMissing.pdf, Supplier 1=Digi-Key
U7: library part "Fonte Hi-Link", "Fonte chaveada isolada", ChinesePrice=0,00000, Chinês=----, ComponentLink1Description=Datasheet, ComponentLink1URL=D:\Tecnoclade\Datasheet\IE1212S.pdf, Corrente=4, Potência=3w, Supplier 1=Digi-Key, Tensão=5v
U8: "SIMPLE LM35 Precision Centigrade Temperature Sensors", Supplier Part Number 1=LM35DZ/NOPB-ND, ChinesePrice=0,00000, Chinês=----, ComponentLink1Description=Datasheet, ComponentLink1URL=http://www.ti.com/lit/ds/symlink/lm35.pdf, Supplier 1=Digi-Key, Tensão=3V3
U9: library part MCP73832/1, "Miniature Single-Cell, Fully Integrated Li-Ion, Li-Polymer Charge Management Controllers", Supplier Part Number 1=MCP73831T-2ACI/OTCT-ND, ChinesePrice=0,00000, Chinês=----, ComponentLink1Description=Datasheet, ComponentLink1URL=D:\Tecnoclade\Datasheet\, Corrente=500mA, Obs="73831=Tri-State / 73832=Open Drain", Supplier 1=Digi-Key, Supplier 2=Digi-Key, Tensão="Vdd=3V75 ~ 6V"
X1: library part XTAL, "Crystal Oscillator", Supplier Part Number 1=535-10226-1-ND, ChinesePrice=0,00000, Chinês=----, Supplier 1=Digi-Key

## Free pads (board coordinates)
  round 0 hole 1 slot 2.5 at 90 deg unplated paste+0 mask+0: 2(49.9,18.25)
  oval 1x0 hole 1 slot 2 at 90 deg unplated paste+0 mask+0: 2(49.9,21.225)
  round 1 hole 1 slot 6.5 at 0 deg unplated paste+0 mask+0: 2(53.825,22.875) 2(53.875,16.875)
  round 1 hole 1 slot 6.5 at 90 deg unplated paste+0 mask+0: 2(58.15,19.825)

## Via types
v1: diameter 0.5, hole 0.3, Top Layer to Bottom Layer, tented both sides, 299 vias

## Nets (pads, with @x,y where several pads share a name; then routed paths per layer and width w, separated by ;. In a path a pad name is that pad's centre, name@x,y a point inside that pad or via, vN(x,y) a via of type N, cw(c..) or ccw(c..) an arc to the next point about the centre after c; other vN are vias at no path point)
3V3: C2.2 C4.2 C6.2 C8.2 C11.2 C12.2 C17.2 C18.2 C24.2 C25.2 I2C.1 ICSP.2 L1.1 R1.2 R3.2 R4.2 R7.2 R29.2 R30.2 R33.2 SERIAL.4 SPI.1 U1.4 U1.6 U1.18 U3.5 U4.5 U5.4 U8.1 | length 187
  Top Layer w0.254: R1.2@36.7,20.28 v1(36.7,20.5) ; C2.2 41.32,17.22 U5.4 41.675,17.25 42.477,18.052 42.477,20.323 v1(42.45,20.35) ; R30.2 46.795,5.681 47.826,4.65 53.19,4.65 ; 52.72,4.705 R29.2 ; 53.192,4.648 54.35,4.648 ; C18.2 54.375,4.623 54.35,4.648 ; R33.2@59.352,5.782 R33.2 59.145,5.345 58.448,4.648 54.35,4.648
  Top Layer w0.3: C8.2 23.245,27.675 U1.18
  Top Layer w0.4: U4.5 v1(55.95,19.85) 56.57,19.85 C17.2 ; v1(57.05,25.65) 59.425,23.275 59.425,5.855 R33.2@59.352,5.782
  Top Layer w0.5: U3.5 C24.2@12.3,20.675 ; C24.2@12.645,21.07 v1(13.125,21.07) v1(13.7,21.07) v1(14.275,21.07) R7.2 ; v1(22.05,55.075) v1(22.625,55.075) v1(23.2,55.075) 23.925,55.075 ; U1.4 v1(34.4,25.275) 34.6,25.075 C4.2 ; U1.6 v1(34.325,26.875) ; v1@34.378,26.875 35.03,26.875 C6.2
  Top Layer w0.8: R3.2 v1(29.92,15.35) R4.2
  Bottom Layer w0.4: v1(55.95,19.85) 57.35,21.25 57.35,25.8
  Bottom Layer w0.7: SERIAL.4 v1@30.005,15.265
  Bottom Layer w0.8: 13.5,20.825 13.7,20.625 27.025,20.625 ; v1(24,27.625) 29.325,27.625 31.675,25.275 ; v1(29.92,15.35) 27.975,15.35 27.025,16.3 27.025,20.625 ; v1@34.35,26.85 34.35,25.275 31.675,25.275 ; SPI.1 57.4,31.1 57.4,26.175 56.875,25.65 50.925,25.65 49.46,27.115 ICSP.2 42.71,20.625 27.025,20.625 ; 27.025,20.625 31.675,25.275
  Bottom Layer w1.65: v1(13.7,21.07) 13.7,21.65 11.875,23.475 11.875,37.425 22.55,48.1 22.55,51.825 ; 22.55,51.9 v1@22.55,55.075
  other v1: 22.875,55.475
3V3RF: C13.2 C14.2 C15.2 C16.2 L1.2 U2.13 | length 2.5
  Top Layer w0.7: L1.2@22.075,57.475 v1(22.075,59.925)
  other v1: 22.075,58.275 32.175,58.325 22.075,58.825 32.175,58.825 32.175,59.35 22.075,59.375 32.175,59.875
5V: C1.2 C21.2 C22.2 D1.2 D2.2 TB.1 U3.1 U6.1 U6.6 | length 31.6
  Top Layer w0.5: TB.1 18.575,11.85 C1.2@18.575,10.27 ; C1.2@18.58,10.275 v1(19.475,10.275) U6.6 U6.1
  Top Layer w0.7: D1.2 D2.2 6.175,16.925 C21.2 U3.1
  Bottom Layer w0.8: v1(8.975,16.975) 8.975,11.75 11.2,9.525 14.45,9.525 15.2,10.275 v1(19.475,10.275)
ANE: CN2.4 D6.2 U1.23 | length 34.7
  Top Layer w0.3: U1.23 26.475,23.675 27.35,22.8 v1(30.575,22.8) ; v1(34.75,22.025) 35.1,22.375 38.826,22.375 40.101,21.1 42.69,21.1 43.15,20.64 43.15,9.59 CN2.4
  Bottom Layer w0.3: v1(30.575,22.8) 31.35,22.025 v1(34.75,22.025) ; CN2.4 43.11,10.61 D6.2
CS: R19.1 U1.14 | length 5.6
  Top Layer w0.3: U1.14 27.975,31.125 28.75,31.9 30.125,31.9 30.819,32.594 R19.1
CS2: R11.1 U1.13 | length 27.9
  Top Layer w0.3: U1.13 28.85,29.975 28.776,30.049 v1(28.776,30.902) ; v1(52.55,36.625) R11.1
  Bottom Layer w0.3: v1(28.776,30.902) 31.075,33.2 44.2,33.2 45.425,34.425 50.325,34.425 v1@52.525,36.625
DIO0: R16.2 U1.32 | length 16.7
  Top Layer w0.3: U1.32 32.25,21.175 34.951,21.175 v1(35.352,21.576) ; v1(32.6,32.35) 32.625,32.35 R16.2@32.625,33.48
  Bottom Layer w0.3: v1@32.625,32.35 35.352,29.623 v1(35.352,21.576)
DONE: R5.2 U1.12 U6.4 | length 24.5
  Top Layer w0.3: R5.2 R5.2@22.22,12.175 ; U6.4 22.375,12.33 23.075,13.03 v1(23.075,23.275) ; v1(27.175,24.225) 29.575,26.625 U1.12
  Bottom Layer w0.3: v1(23.075,23.275) 26.225,23.275 v1(27.175,24.225)
GND: BAT.2 C1.1 C2.1 C4.1 C5.1 C6.1 C7.1 C8.1 C9.1 C10.1 C11.1 C12.1 C13.1 C14.1 C15.1 C16.1 C17.1 C18.1 C19.1 C20.2 C21.1 C22.1 C23.1 C24.1 C25.1 C26.1 C27.1 CN1.2 CN1.3 CN1.4 CN1.5 CN4.2 D3.2 D4.2 D5.1 D6.1 D7.1 D8.1 D9.1 I2C.4 ICSP.6 LED1.2 LED3.2 R5.1 R9.1 R10.1 R21.1 R22.1 R23.1 R24.1 R25.1 R26.1 R27.1 R28.1 R31.1 R32.1 R34.1 SERIAL.5 SERIAL.6 SPI.2 U1.3 U1.5 U1.21 U2.1 U2.8 U2.10 U3.2 U4.2 U5.2 U6.2 U7.2 U8.3 U9.2 | length 31.5
  Top Layer w0.4: v1(2.375,5.625) C26.1 ; v1(2.6,4.45) R22.1 ; v1(6.2,14) C21.1 ; v1(8.05,14.85) C22.1 ; U9.2 v1(10.25,5.425) ; v1(9.925,9.35) R21.1 ; C24.1 v1(10.075,21.4) ; C25.1 v1(10.755,19.42) ; v1(14.975,16) LED3.2 ; C27.1@18.375,3.625 v1(19.075,3.625) ; v1(18.575,8.225) C1.1@18.575,8.73 ; v1(21.425,7.4) U6.2 ; C7.1@21.655,26.1 C8.1 ; R27.1 R28.1 R25.1 R26.1 ; v1(23.87,25.275) U1.21 v1(26.125,25.275) ; C4.1 C6.1@36.795,26.65 ; R9.1 v1(39.82,1.57) ; R10.1 v1(39.82,4.245) ; R23.1 v1(39.82,6.895) ; R24.1 v1(39.82,9.495) ; 48.6,19.85 U4.2 ; C17.1 v1(57.27,18.155)
  Bottom Layer w0.4: v1(51.675,19.825) 53.345,18.155 v1(57.27,18.155)
  other v1: 48.425,1.2 2.6,1.6 6.6,1.6 10.6,1.6 14.6,1.6 18.6,1.6 42.6,1.6 46.6,1.6 50.6,1.6 22.505,1.725 54.4,1.775 47.575,2.025 49.35,2.05 54.9,2.125 25.8,2.7 35.425,2.8 48.4,2.925 22.5,3.275 22.525,4.85 12.6,5.6 16.6,5.6 20.6,5.6 28.6,5.6 32.6,5.6 40.6,5.6 41.9,5.7 47.8,5.7 54.2,5.825 10.225,7.375 53.425,7.625 5,7.725 6.6,9.6 12.975,10.475 24.05,10.825 52.8,11.7 58.525,11.75 40.525,11.775 13.875,12.325 11.1,12.425 0.95,13.05 52.8,13.375 40.55,13.425 58.525,13.475 28.6,13.6 56.6,13.6 19.075,14.3 34.725,15.025 16.675,15.175 39.325,15.4 19.075,15.8 46.6,17.6 38.35,18.175 44.1,18.7 25.875,19.125 13.7,19.575 23.9,19.575 45.6,19.775 46.5,21.075 8.6,21.6 16.6,21.6 48.6,21.6 24.425,21.65 37.8,21.65 1.675,21.7 31.625,23.15 48.275,24.225 56.4,24.275 29.075,24.625 40.125,25.15 59,25.225 2.6,25.6 6.6,25.6 36.795,25.863 21.655,26.825 31.325,27.825 46.8,28.225 27.6,28.625 36.8,29.225 55.825,29.3 34.4,29.35 4.6,29.6 8.6,29.6 20.6,29.6 44.6,29.6 40.15,30.675 25.275,31.1 27.692,31.491 31.475,31.825 35.925,32.1 26.2,32.7 6.6,33.6 14.6,33.6 18.6,33.6 22.6,33.6 46.6,33.6 34.75,34.2 52.3,34.925 48.95,36.7 51.55,36.85 4.6,37.6 8.6,37.6 16.6,37.6 24.6,37.6 32.6,37.85 26.125,38.625 40.15,38.65 40.875,40.175 25.5,40.225 53.45,40.525 2.6,41.6 6.6,41.6 10.6,41.6 18.6,41.6 22.6,41.6 4.6,45.6 8.6,45.6 12.6,45.6 16.6,45.6 24.6,45.6 28.6,45.6 36.6,45.6 40.6,45.6 48.6,45.6 52.6,45.6 56.6,45.6 26.6,49.6 34.6,49.6 38.6,49.6 42.6,49.6 46.6,49.6 50.6,49.6 54.6,49.6 23.85,51.375 24.25,51.975 47.975,52.025 48.658,52.025 49.342,52.025 50.025,52.025 55.887,52.045 55.136,52.117 21.225,52.95 51.03,53.052 51.748,53.281 47.293,53.419 28.6,53.6 32.6,53.6 36.6,53.6 44.6,53.6 39.934,53.707 40.68,53.815 57.718,54.105 41.182,54.377 43.969,54.766 43.218,54.829 51.67,54.819 44.718,54.853 41.715,54.911 42.469,54.911 50.957,55.063 55.034,55.953 47.925,56.075 48.608,56.075 49.292,56.075 49.975,56.075 55.779,56.066 46.492,56.333 42.029,56.449 42.783,56.449 41.276,56.481 37.525,57 38.775,57 43.375,57.2 39.649,57.6 42.6,57.6 50.6,57.6 40.484,57.669 43.95,57.675 29.35,57.9 47.1,58.1 35.725,58.35 47.525,58.65 36.425,59.075 26.675,60.45 25.575,60.475 29.325,60.475 21.4,61.125 22.552,61.125 23.703,61.125 24.855,61.125 26.006,61.125 27.158,61.125 28.309,61.125 29.461,61.125 30.612,61.125 31.764,61.125 32.915,61.125 34.067,61.125 35.218,61.15 36.37,61.15 37.521,61.15 38.673,61.15 39.824,61.15 40.976,61.15 42.127,61.15 43.279,61.15 44.43,61.15 46.733,61.15 47.885,61.15 49.036,61.15 50.188,61.15 51.339,61.15 52.491,61.15 53.642,61.15 54.794,61.15 55.945,61.15 57.097,61.15 58.248,61.15 59.4,61.15
INT0: CN3.2 D8.2 U1.2 | length 30.4
  Top Layer w0.3: U1.2 39.825,23.675 41.025,22.475 44.075,22.475 48.05,18.5 48.05,17.725 49.946,15.829 52.796,15.829 55.635,12.99 CN3.2
  other v1: 55.5,11.825 55.375,13.325
INT1: CN2.2 D3.1 U1.1 | length 27.6
  Top Layer w0.3: U1.1 34.751,22.875 34.851,22.975 39.075,22.975 40.175,21.875 43.15,21.875 44.975,20.05 44.975,14.1 48.19,10.885 CN2.2
  Bottom Layer w0.3: CN2.2 48.2,9.56 D3.1
LED: R2.2 U1.9 | length 4.6
  Top Layer w0.3: U1.9 33.525,29.9 34,30.375 R2.2
LM35: D9.2 U1.22 U8.2 | length 11.9
  Top Layer w0.3: U8.2 22.375,19.85 22.375,23.75 23.1,24.475 U1.22
  Bottom Layer w1: D9.2 20.215,19.01 U8.2
MISO: ICSP.1 R14.1 R15.1 U1.16 | length 56.2
  Top Layer w0.3: R15.1@25.275,33.475 25.275,32.325 26.375,31.225 U1.16
  Bottom Layer w0.3: v1(25.275,32.875) 25.275,35.25 27.1,37.075 46.375,37.075 v1(53.15,43.85) 54.85,42.15 54.85,30.225 ICSP.1
MOSI: ICSP.4 R13.1 R17.1 U1.15 | length 47.5
  Top Layer w0.3: R17.1 v1(27.106,32.875) 27.106,29.969 U1.15 ; ICSP.4 50.725,31.18 50.725,39.9 52.45,41.625 v1(52.65,41.625)
  Bottom Layer w0.3: v1@27.075,33 27.075,35.8 27.45,36.175 47,36.175 52.45,41.625 v1(52.65,41.625)
NetANT1_1: ANT1.1 C23.2 L2.2 | length 7.4
  Top Layer w0.4: ANT1.1 45.555,64.62 L2.2
NetC3_1: C3.1 SERIAL.1 | length 2.2
  Top Layer w0.5: SERIAL.1@37.25,13.55 C3.1@37.25,15.73
NetC5_2: C5.2 U3.4 | length 2.7
  Top Layer w0.3: U3.4 12.305,15.045 C5.2@12.305,12.345
NetC7_2: C7.2 U1.20 | length 1.8
  Top Layer w0.3: C7.2 U1.20
NetC19_2: C19.2 CN1.1 CN4.1 L2.1 U2.9 | length 16.7
  Top Layer w0.5: U2.9@40.15,56.259 U2.9 ccw(c40.198,55.748) 40.198,55.68 C19.2 L2.1 46.441,54.794 ccw(c48.237,56.59) 48.237,54.05 CN1.1
NetCN2_1: CN2.1 D4.1 R29.1 R31.2 | length 10.1
  Top Layer w0.3: R31.2 51.155,5.725 51.18,5.75 v1@50.72,5.75 ; v1@50.73,5.76 CN2.1
  Bottom Layer w0.3: v1(50.7,5.775) 52.375,4.1 D4.1
  other v1: 50.7,5.775 50.7,5.775
NetCN2_3: CN2.3 D5.2 R30.1 R32.2 | length 9.3
  Top Layer w0.3: R32.2 R30.1@44.95,5.725 ; D5.2 44.95,2.575 R30.1@44.95,5.725 ; CN2.3 45.5,9.4 45.5,5.97 R30.1 R30.1@44.95,5.725
NetCN3_1: CN3.1 D7.2 R33.1 R34.2 | length 5.7
  Top Layer w0.3: R34.2 R33.1 57.605,9.13 CN3.1
  other v1: 57.625,7.575
NetCN6_1: CN6.1 F1.1 | length 5.6
  Top Layer w1: F1.1 14.3,75.5 CN6.1
NetCN7_1: CN7.1 R6.1 U7.4 | length 12
  Top Layer w1: CN7.1 4.35,71.05 R6.1 5.9,66.3 U7.4
NetF1_2: F1.2 R6.2 U7.3 | length 13.5
  Top Layer w1: F1.2 10.9,71.52 R6.2 12.8,66.65 U7.3
NetLED1_1: LED1.1 R2.1 | length 1.8
  Top Layer w0.4: R2.1 LED1.1
NetLED2_2: LED2.2 R8.2 | length 1.7
  Top Layer w0.3: LED2.2 R8.2
NetLED3_1: LED3.1 R7.1 | length 1.5
  Top Layer w0.4: LED3.1@15,17.995 R7.1
NetR8_1: R8.1 U9.1 | length 1.9
  Top Layer w0.4: R8.1@8.975,2.595 U9.1
NetR9_2: R9.2 R10.2 SW1.8 | length 5.6
  Top Layer w0.3: SW1.8 38.28,1.34 R10.2
NetR11_2: R11.2 SPI.3 | length 2.2
  Top Layer w0.3: R11.2 SPI.3@56.955,36.625
NetR12_2: R12.2 SPI.4 | length 2.1
  Top Layer w0.3: R12.2 SPI.4@56.895,39.225
NetR13_2: R13.2 SPI.5 | length 2.1
  Top Layer w0.3: R13.2 SPI.5@56.835,41.825
NetR14_2: R14.2 SPI.6 | length 2.6
  Top Layer w0.3: R14.2 56.775,44.425 SPI.6
NetR15_2: R15.2 U2.2 | length 6.4
  Top Layer w0.3: R15.2 25.25,35.475 28.15,38.375 U2.2
NetR16_1: R16.1 U2.14 | length 25.1
  Top Layer w0.4: R16.1 35.1,37.445 v1(35.1,37.825)
  Bottom Layer w0.4: v1@30.2,57.1 30.2,47.5 35.1,42.6 v1(35.1,37.825)
  other v1: 30.175,57.1
NetR17_2: R17.2 U2.3 | length 6.4
  Top Layer w0.3: R17.2 27.106,35.481 30.15,38.525 U2.3
NetR18_2: R18.2 U2.4 | length 6.5
  Top Layer w0.3: R18.2 28.962,35.288 32.15,38.475 U2.4
NetR19_2: R19.2 U2.5 | length 6.6
  Top Layer w0.3: R19.2 34.15,38.351 U2.5
NetR22_2: R22.2 U9.5 | length 1.9
  Top Layer w0.3: R22.2 U9.5@6.75,4.45
NetR23_2: R23.2 R24.2 SW1.7 | length 10.5
  Top Layer w0.3: SW1.7 37.305,6.25 R23.2 R24.2
NetR25_2: R25.2 R26.2 SW1.6 | length 8.5
  Top Layer w0.3: R26.2 R25.2 27.145,4.05 SW1.6
NetR27_2: R27.2 R28.2 SW1.5 | length 5
  Top Layer w0.3: R28.2 R27.2 24.485,1.34 SW1.5
NetSW1_1: SW1.1 SW1.2 SW1.3 SW1.4 U6.3 | length 12.8
  Top Layer w0.3: U6.3 24.375,8.325 25.01,8.96 SW1.4 SW1.3 SW1.2 SW1.1
P_EN: TB.2 U3.3 U6.5 | length 17.1
  Top Layer w0.3: v1(10.1,13.45) U3.3 ; U6.5 v1@21.425,13.4
  Bottom Layer w0.3: v1(10.1,13.45) v1(21.425,13.45) ; TB.2 15.535,13.435
RST: C3.2 ICSP.5 R1.1 U1.29 | length 33.4
  Top Layer w0.3: U1.29 29.575,19.802 29.877,19.5 v1(29.905,19.5) ; v1@33.699,19.524 34.05,19.875 34.755,19.875 ; v1(36.512,21.576) 36.512,21.462 35.155,20.105 R1.1 35.155,19.87 37.075,17.95 C3.2@37.075,17.47
  Bottom Layer w0.3: v1(29.905,19.5) v1(33.675,19.5) ; v1(36.512,21.576) 36.5,21.589 36.5,23.05 44.65,31.2 50.745,31.2 ICSP.5
RX: SERIAL.3 U1.30 | length 10.4
  Top Layer w0.3: U1.30 30.375,20.125 31.45,19.05 32.375,19.05 33.325,18.1 33.325,14.8 32.545,14.02 SERIAL.3
SCK: ICSP.3 R12.1 R18.1 U1.17 | length 46.9
  Top Layer w0.3: v1(24.45,32.15) 24.45,29.975 24.95,29.475 U1.17 ; v1@28.962,32.887 R18.1
  Bottom Layer w0.3: v1(24.45,32.15) 28.225,32.15 v1(28.95,32.875) 28.963,32.888 28.963,34.838 29.4,35.275 48.815,35.275 52.7,39.16 v1(52.7,39.225) 53.25,38.675 53.25,31.165 ICSP.3
SCL: I2C.3 R4.1 U1.28 U4.6 U5.1 | length 35.9
  Top Layer w0.3: U1.28 28.775,19.601 29.576,18.8 30.805,18.8 I2C.3 R4.1@32.08,15.35 ; v1(38.35,19.325) 38.975,19.325 U5.1
  Bottom Layer w0.3: I2C.3 32.725,17.525 34.525,19.325 43.375,19.325 47.125,23.075 49.675,23.075 51.075,21.675 54.85,21.675 v1(55.675,20.85)
SDA: I2C.2 R3.1 U1.27 U4.1 U5.3 | length 31.9
  Top Layer w0.3: R3.1 27.78,15.765 I2C.2 ; U1.27 27.975,19.375 I2C.2@29.565,17.785
  Bottom Layer w0.3: I2C.2 30.94,16.125 37.4,16.125 39.1,17.825 45.1,17.825 47.125,19.85 50.71,19.85 51.675,20.815 v1(51.675,20.825)
  other v1: 38.35,17.075
TX: SERIAL.2 U1.31 | length 12.3
  Top Layer w0.3: U1.31 31.175,20.175 31.575,19.775 32.6,19.775 33.55,18.825 35.225,18.825 36.025,18.025 36.025,14.09 SERIAL.2
VBAT: BAT.1 C27.2 D1.1 R20.2 U9.3 | length 22.4
  Top Layer w0.7: D1.1 3.975,10.1 5.7,8.375 10.65,8.375 11.95,7.075 ; 8.35,8.375 R20.2 ; U9.3 11.25,6.375 11.95,7.075 ; C27.2@18.05,6.15 18.05,6.45 17.425,7.075 BAT.1 11.95,7.075
VBAT_MON: R20.1 R21.2 U1.25 | length 27.9
  Top Layer w0.3: R21.2 11.645,9.725 15.475,9.725 16.8,11.05 16.8,13.775 17.4,14.375 17.4,16.25 v1(18.15,17) ; v1(24.625,17) 24.625,19.2 26.375,20.95 U1.25
  Top Layer w0.5: R20.1 R21.2
  Bottom Layer w0.3: v1(18.15,17) 18.16,17.01 v1@24.625,17.01
VIN: C20.1 C26.2 D2.1 LED2.1 U7.1 U9.4 | length 37.7
  Top Layer w0.4: LED2.1 v1(4.23,3.08)
  Top Layer w0.7: U7.1 2.6,28.425 C20.1 3.975,27.05 D2.1 3.6,19.725 2.125,18.25 2.125,9.3 4.575,6.85 C26.2 4.6,6.375 U9.4
  Bottom Layer w0.4: v1(4.23,3.08) 4.23,5.055 v1(5.525,6.35)
X1: C9.2 U1.7 X1.1 | length 12.4
  Top Layer w0.3: U1.7 37.871,27.675 cw(c37.871,26.821) 38.475,27.425 ccw(c39.151,28.101) 39.151,27.145 C9.2 43.305,27.145 X1.1@43.8,26.65 ; X1.1@43.181,26.619 cw(c41.685,25.124) X1.1@43.8,25.124
X2: C10.2 U1.8 X1.2 | length 14.7
  Top Layer w0.3: U1.8 39.945,28.475 C10.2 40.778,28.655 ccw(c40.778,30.772) 42.275,29.275 43.056,30.056 ccw(c41.26,31.852) 43.8,31.852 X1.2@43.8,34.325
pads on no net: ANT1.2 CN6.0 CN7.0 M1.X M2.X U1.10 U1.11 U1.19 U1.24 U1.26 U2.6 U2.7 U2.11 U2.12 U2.15 U2.16 U4.3 U4.4 U5.5

## Polygon pours and split planes (outlines as drawn)
GND on Bottom Layer "Top Layer-No Net" (solid, pour order 2): 0,0 60,0 60,14.725 ccw(c58.7,14.725) 58.7,16.025 50.525,16.025 cw(c50.525,17.375) 49.175,17.375 49.175,22.3 cw(c50.3,22.3) 50.3,23.425 58.575,23.425 ccw(c58.575,24.85) 60,24.85 60,60.8 ccw(c59.4,60.8) 59.4,61.4 21.575,61.4 ccw(c21.575,60.2) 20.375,60.2 20.375,49.99 cw(c17.835,49.99) 17.835,47.45 -0.05,47.45
GND on Top Layer "Top Layer-No Net" (solid, pour order 0): 0,0 60,0 60,14.725 ccw(c58.7,14.725) 58.7,16.025 50.525,16.025 cw(c50.525,17.375) 49.175,17.375 49.175,22.3 cw(c50.3,22.3) 50.3,23.425 58.575,23.425 ccw(c58.575,24.85) 60,24.85 60,60.8 ccw(c59.4,60.8) 59.4,61.4 21.575,61.4 ccw(c21.575,60.2) 20.375,60.2 20.375,49.99 cw(c17.835,49.99) 17.835,47.45 -0.05,47.45

## Keep-outs
Keep-Out Layer:
  lines w0.1: 0,0 0,78 60,78 60,0 0,0

## Other copper
Top Layer:
  rectangle net 3V3: 21.225,54.1 24.25,55.85
  rectangle net 3V3RF: 31.55,55.725 32.75,60.55
  rectangle net 3V3RF: 30.85,58.025 34.15,60.55
Bottom Layer:
  rectangle net 3V3RF: 21.8,58.325 32.5,59.95
  rectangle net 3V3: 12.875,20.825 14.525,21.775
  rectangle net 3V3: 21.8,54.83 23.45,55.675

## Silkscreen, mask and mechanical layers (free items; w line width, h text height)
Top Overlay:
  drawing of 971 lines, arcs and shapes, not listed
  text "NAVARRO" at 43.502,50.003 h0.81
  text "N" at 43.459,49.878 h4.38 r270
  text "\"The only true wisdom is in knowing you know nothing.\" Socrates" at 2.675,49.05 h1.5
  text "01/2018 - V1.0" at 10.525,29.8 h1.2
  text "Yet Another IoT Node" at 23.05,29.475 h1.8 r90
  text "1" at 34.425,22.416 h1.52
Bottom Overlay:
  circle w0.178: c3.389,13.554 r0.191
  circle w0.178: c4.012,9.462 r0.099
  circle w0.178: c4.012,9.462 r0.447
  lines w0.178: 2.089,14.276 7.588,8.614 ; 2.424,8.657 7.715,14.365 ; 3.57,13.3 3.232,13.293 6.681,13.293 ; 3.57,13.333 3.57,13.346 3.867,9.996 ; 4.497,9.366 5.848,9.366 5.848,9.681 6.171,13.478 ; 5.485,9.109 5.485,9.236 ; 5.612,13.427 5.612,13.808 ; 1.802,8.22 8.152,8.22 8.152,14.57 1.802,14.57 1.802,8.22 ; 3.199,12.444 3.643,12.444 3.613,12.927 3.199,12.927 3.199,12.444 ; 3.626,13.562 cw(c4.258,12.83) 4.316,13.796 3.626,13.562 ; 4.253,12.061 5.132,12.061 5.132,12.297 4.253,12.297 4.253,12.061 ; 4.332,13.722 5.211,13.722 5.211,13.966 4.332,13.966 4.332,13.722 ; 5.233,13.808 cw(c5.188,12.064) 6.171,13.506 5.233,13.808
  lines w0.203: 3.585,4.143 ccw(c3.407,3.534) 3.407,4.169 cw(c3.407,3.534) 3.585,4.143 ; 3.585,4.143 ccw(c3.768,4.77) 3.737,4.118 ; 3.585,4.143 ccw(c3.768,4.77) 3.737,4.118 ; 3.687,3.076 ccw(c3.077,2.551) 3.077,3.356 cw(c3.077,2.551) 3.687,3.076 ; 3.686,3.076 ccw(c4.279,3.587) 3.864,2.924 ; 3.686,3.076 ccw(c4.279,3.587) 3.864,2.924 ; 3.737,4.118 ccw(c3.928,8.197) 4.118,4.118 ; 3.737,4.118 ccw(c3.928,8.197) 4.118,4.118 ; 3.864,2.924 4.779,2.619 ; 3.864,2.924 4.779,2.619 ; 4.118,4.118 ccw(c3.984,6.993) 4.753,4.219 ; 4.118,4.118 ccw(c3.984,6.993) 4.753,4.219 ; 4.753,4.219 cw(c5.05,3.15) 5.744,4.016 ; 4.753,4.219 cw(c5.05,3.15) 5.744,4.016 ; 4.779,2.619 cw(c4.779,1.984) 5.414,2.01 ; 4.779,2.619 cw(c4.779,1.984) 5.414,2.01 ; 5.414,2.01 ccw(c5.559,2.065) 5.642,1.933 ; 5.414,2.01 ccw(c5.559,2.065) 5.642,1.933 ; 5.465,2.67 cw(c1.207,-0.5) 5.642,2.416 ; 5.465,2.67 cw(c1.207,-0.5) 5.642,2.416 ; 5.464,2.67 ccw(c4.84,2.205) 4.957,2.975 cw(c4.84,2.205) 5.464,2.67 ; 5.642,1.933 5.668,1.984 ; 5.642,1.933 5.668,1.984 ; 5.642,2.416 cw(c5.279,2.178) 5.668,1.984 ; 5.642,2.416 cw(c5.279,2.178) 5.668,1.984 ; 5.744,4.016 cw(c5.493,3.703) 5.871,3.838 ; 5.744,4.016 cw(c5.493,3.703) 5.871,3.838 ; 5.871,3.026 ccw(c6.051,3.29) 5.998,2.975 ; 5.871,3.026 cw(c9.82,8.81) 5.49,3.305 ccw(c9.82,8.81) 5.871,3.026 ; 5.871,3.026 ccw(c6.051,3.29) 5.998,2.975 ; 5.871,3.838 ccw(c6.216,3.961) 6.049,3.635 ; 5.871,3.838 ccw(c6.216,3.961) 6.049,3.635 ; 5.998,2.975 6.15,2.949 ; 5.998,2.975 6.15,2.949 ; 6.023,2.035 ccw(c6.138,1.976) 6.227,1.883 ; 6.023,2.035 ccw(c6.138,1.976) 6.227,1.883 ; 6.023,2.035 6.1,2.187 ; 6.023,2.035 6.1,2.187 ; 6.049,2.543 cw(c6.433,2.598) 6.074,2.746 ; 6.049,2.543 cw(c6.433,2.598) 6.074,2.746 ; 6.049,2.543 6.1,2.187 ; 6.049,2.543 6.1,2.187 ; 6.049,3.635 6.176,3.534 ; 6.049,3.635 6.176,3.534 ; 6.074,2.746 ccw(c2.62,4.157) 6.15,2.949 ; 6.074,2.746 ccw(c2.62,4.157) 6.15,2.949 ; 6.176,3.534 6.328,3.407 ; 6.176,3.534 6.328,3.407 ; 6.227,1.883 ccw(c5.791,2.314) 6.404,2.314 ; 6.227,1.883 ccw(c5.791,2.314) 6.404,2.314 ; 6.328,3.407 cw(c6.051,3.074) 6.481,3.127 ; 6.328,3.407 cw(c6.051,3.074) 6.481,3.127 ; 6.404,2.314 6.404,2.645 ; 6.404,2.314 6.404,2.645 ; 6.404,2.645 6.43,2.848 ; 6.404,2.645 6.43,2.848 ; 6.43,2.848 6.455,3 ; 6.43,2.848 6.455,3 ; 6.455,3 6.481,3.102 ; 6.455,3 6.481,3.102 ; 6.481,3.102 6.481,3.127 ; 6.481,3.102 6.481,3.127
  lines w0.254: 1.782,0.994 8.081,0.994 1.782,0.994 ; 1.782,0.994 4.906,7.318 ; 1.782,0.994 4.906,7.318 ; 4.906,7.318 8.106,0.994 4.906,7.318 ; 1.705,0.994 6.531,4.092 1.705,0.994

## Text inside footprints (layer, text, board x,y; h text height)
BAT: Top Overlay "1" at 13.458,10.344 h1.5 r270
CN2: Top Overlay "1" at 52.46,9.085 h1.5; Top Overlay "4" at 40.789,9.068 h1.5
CN3: Top Overlay "1" at 57.927,13.123 h1.5
I2C: Top Overlay "1" at 25.065,17.029 h1.5
ICSP: Top Overlay "2" at 49.984,25.118 h1.6 r90; Top Overlay "1" at 52.508,25.343 h1.6 r90; Top Overlay "5" at 52.607,33.891 h1.6 r90; Top Overlay "6" at 50.003,33.946 h1.6 r90
SERIAL: Top Overlay "1" at 39.56,13.646 h1.5 r180
SPI: Top Overlay "1" at 57.621,29.44 h1.5 r90
TB: Top Overlay "1" at 19.996,12.864 h1.5 r180
U8: Top Overlay "3" at 21.34,13.604 h1.5 r90; Top Overlay "1" at 21.34,22.62 h1.5 r90